# EAGLE board AutoZ Task 1 (EAGLE 9.7.0)

Size 56.19 x 59.62 mm. Coordinates in mm from the lower left corner, seen from the top.
Outline: 0,0 56.19,0 56.19,59.62 0,59.62 0,0
Copper layers (1*16): Top 0.035mm / dielectric 1.5mm / Bottom 0.035mm
Design rules "default": minimum track width 6mil, minimum drill 0.35mm, track to track 6mil, track to pad 6mil, pad to pad 6mil, via to via 6mil, smd to smd 6mil, copper to edge 40mil, drill to drill 6mil, minimum pad ring 10mil, minimum via ring 8mil, stop-mask expansion 4mil, vias tented up to drill 0mil, thermal gap 10mil

## Footprints (pad centres in the part's own frame; a part is rotated, then mirrored left to right if it is on the bottom)
BATTERY-GENERIC = drill 1.118 pad 3.15 octagon: + 2.54,0; - -2.54,0
CAP-THRU-2.54MM = drill 1.016 pad 1.88: 1 -1.27,0; 2 1.27,0
LEDRD254W60D565H860B = drill 0.981 pad 1.581: 1 -1.27,0; 2 1.27,0
RESAD1016W63L850D250B = drill 0.83 pad 1.43: 1 -5.08,0; 2 5.08,0
DIP826W53P254L959H508Q8B = drill 0.786 pad 1.386: 1 -4.13,3.81; 2 -4.13,1.27; 3 -4.13,-1.27; 4 -4.13,-3.81; 5 4.13,-3.81; 6 4.13,-1.27; 7 4.13,1.27; 8 4.13,3.81

## Placement (x,y rotation side)
BAT1  9V  [BATTERY-GENERIC]  47.93,51.36 270 top
C1  10n  [CAP-THRU-2.54MM]  36.83,20.52 0 top
C2  1000u  [CAP-THRU-2.54MM]  5.71,19.83 0 top
D1  RED  [LEDRD254W60D565H860B]  36.69,7.91 0 top
R2  1k  [RESAD1016W63L850D250B]  26.82,7.91 0 top
R3  1k  [RESAD1016W63L850D250B]  10.79,37.11 0 top
R4  1k  [RESAD1016W63L850D250B]  11.34,46.98 0 top
UMAIN  LM555_DIP  [DIP826W53P254L959H508Q8B]  20.46,25.17 90 top

## Library data of the parts
BAT1 C1 C2 R2-R4 = Tinkercad
D1 = Tinkercad; CATEGORY: Opto-Electronic; SUB-CATEGORY: LED; VALUE: LED_RED
UMAIN = Tinkercad; CATEGORY: IC_Clock-Timing; CURRENT-SUPPLY: 10mA; DESCRIPTION: IC OSC SINGLE TIMER 100KHZ 8-DIP; FREQUENCY: 100kHz; MANUFACTURER: Texas Instruments; MPN: LM555CN/NOPB; OPERATING_TEMP: 0°C to 70°C; PART_STATUS: Active; ROHS_COMPLIANT: ROHS3 Compliant; SUB-CATEGORY: Timer

## Nets
BAT1+: BAT1.+ R4.1 UMAIN.4 UMAIN.8
BAT1-: BAT1.- C1.2 C2.1 D1.2 UMAIN.1
D1_A: D1.1 R2.2
UMAIN_CV: C1.1 UMAIN.5
UMAIN_DIS: R3.2 R4.2 UMAIN.7
UMAIN_OUT: R2.1 UMAIN.3
UMAIN_THR: C2.2 R3.1 UMAIN.2 UMAIN.6

## Tracks (layer width: path | path; a pad name or v marks a point on that pad's centre or on a via)
BAT1+  (3 unrouted)
BAT1-  (4 unrouted)
D1_A  (1 unrouted)
UMAIN_CV  (1 unrouted)
UMAIN_DIS  (2 unrouted)
UMAIN_OUT  (1 unrouted)
UMAIN_THR  (3 unrouted)